# EAGLE board miniadsb (EAGLE 6.1)
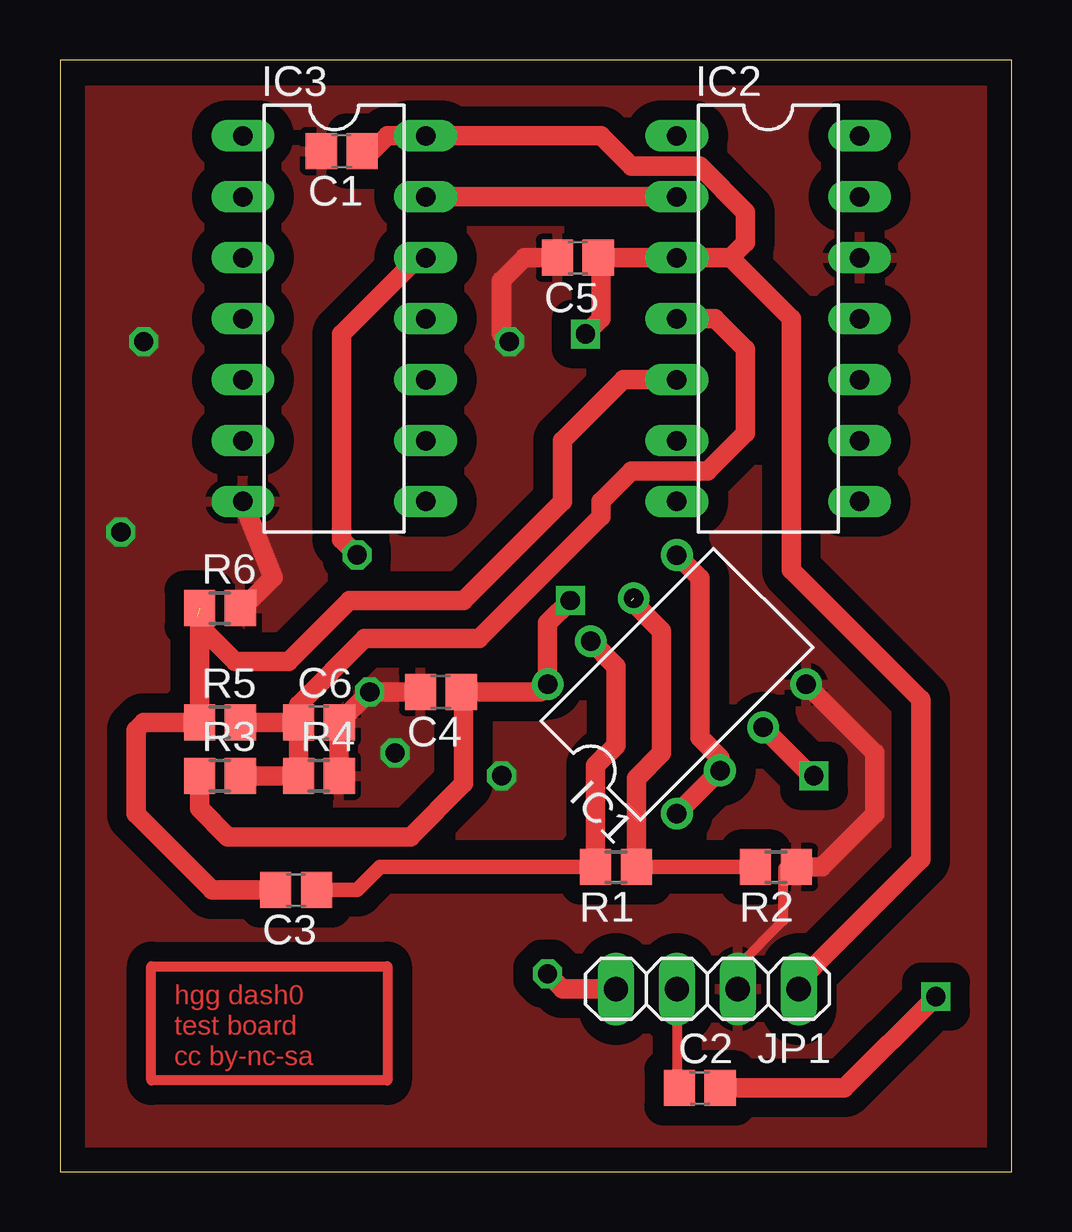
[diagram p0: board, top side]
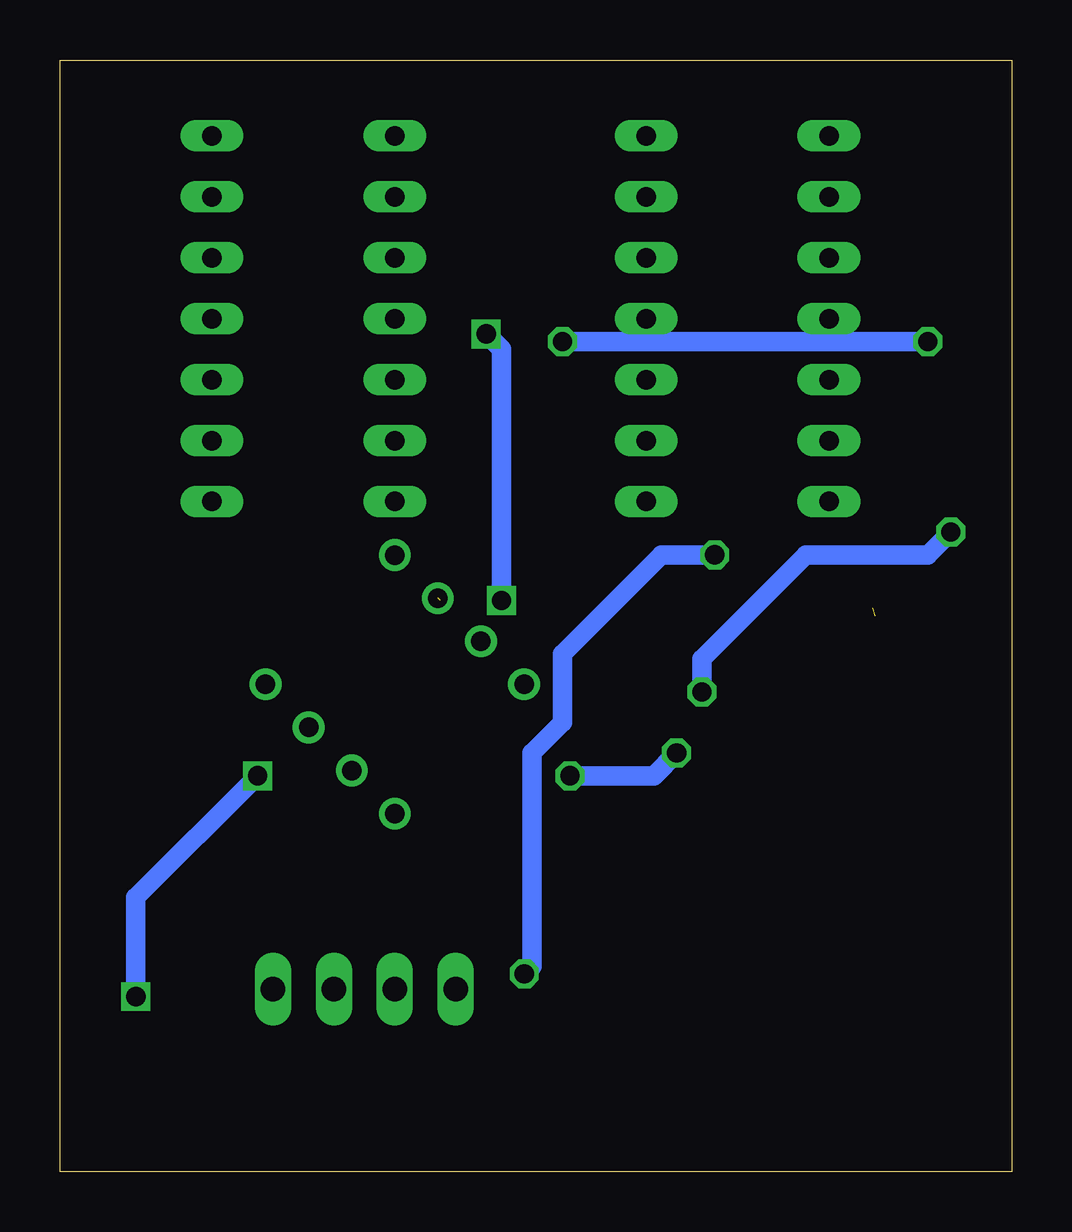
[diagram p1: board, bottom side, seen from below]

Size 39.67 x 46.34 mm. Coordinates in mm from the lower left corner, seen from the top.
Outline: 0,0 39.68,0 39.68,46.34 0,46.34 0,0
Copper layers (1*16): Top 0.035mm / dielectric 1.5mm / Bottom 0.035mm
Design rules: minimum track width 10mil, minimum drill 24mil, track to track 8mil, track to pad 8mil, pad to pad 8mil, via to via 8mil, smd to smd 8mil, copper to edge 40mil, drill to drill 8mil, minimum pad ring 10mil, minimum via ring 8mil, stop-mask expansion 4mil, vias tented up to drill 0mil, thermal gap 10mil

## Footprints (pad centres in the part's own frame; a part is rotated, then mirrored left to right if it is on the bottom)
C0805 = smd 1.3 x 1.5: 1 -0.85,0; 2 0.85,0
DIL08 = drill 0.813 pad 1.27: 1 -3.81,-3.81; 2 -1.27,-3.81; 3 1.27,-3.81; 4 3.81,-3.81; 5 3.81,3.81; 6 1.27,3.81; 7 -1.27,3.81; 8 -3.81,3.81
DIL14 = drill 0.813 long: 1 -7.62,-3.81; 2 -5.08,-3.81; 3 -2.54,-3.81; 4 0,-3.81; 5 2.54,-3.81; 6 5.08,-3.81; 7 7.62,-3.81; 8 7.62,3.81; 9 5.08,3.81; 10 2.54,3.81; 11 0,3.81; 12 -2.54,3.81; 13 -5.08,3.81; 14 -7.62,3.81
1X04 = drill 1.016 long: 1 -3.81,0; 2 -1.27,0; 3 1.27,0; 4 3.81,0
R0805 = smd 1.3 x 1.5: 1 -0.85,0; 2 0.85,0

## Placement (x,y rotation side)
C1  100n  [C0805]  11.75,42.55 180 top
C2  [C0805]  26.67,3.49 0 top
C3  1nF  [C0805]  9.84,11.75 180 top
C4  100n  [C0805]  15.88,20 180 top
C5  100n  [C0805]  21.59,38.1 180 top
C6  470pF  [C0805]  10.79,18.73 0 top
IC1  TLC272P  [DIL08]  25.72,20.32 45 top
IC2  LM339N  [DIL14]  29.53,35.56 270 top
IC3  7414N  [DIL14]  11.43,35.56 270 top
JP1  [1X04]  26.99,7.62 180 top
R1  2k2  [R0805]  23.18,12.7 180 top
R2  1k  [R0805]  29.85,12.7 180 top
R3  1k2  [R0805]  6.67,16.51 0 top
R4  1k2  [R0805]  10.79,16.51 0 top
R5  10k  [R0805]  6.67,18.73 0 top
R6  330k  [R0805]  6.67,23.5 0 top

## Library data of the parts
C1-C6 R1-R6 = resistor
IC1 IC2 = linear
IC3 = 74xx-us
JP1 = pinhead

## Nets
/ADSB_TTL: IC2.2 IC3.13
ADSB: IC3.12 JP1.4
ADSB_IMP: IC1.1 IC1.2 IC1.5
ADSB_IN: C2.1 JP1.3
ADSB_PREAMP: C3.2 IC2.5 R5.1 R6.1
GND: C1.2 C4.2 C5.2 C6.2 IC1.4 IC2.12 IC3.7 JP1.2 R2.1 R4.2 R6.2
N$1: C2.2 IC1.3
N$2: C3.1 IC1.7 R1.2
N$3: IC1.6 R1.1 R2.2
N$5: C6.1 IC2.4 R3.2 R4.1 R5.2
VCC: C1.1 C4.1 C5.1 IC1.8 IC2.3 IC3.14 JP1.1 R3.1

## Tracks (layer width: path | path; a pad name or v marks a point on that pad's centre or on a via)
/ADSB_TTL
  Top 0.813: IC2.2 IC3.13
ADSB  (via drill 0.8)
  Top 0.813: JP1.4 20.95,7.62 v20.32,8.26 | IC3.12 14.92,38.1 11.75,34.92 11.75,26.35 v12.38,25.72
  Bottom 0.813: v12.38,25.72 14.61,25.72 18.73,21.59 18.73,18.73 20,17.46 20,8.57 v20.32,8.26
ADSB_IMP
  Top 0.813: IC1.1 IC1.2 27.51,17.25 26.67,18.1 26.67,24.76 IC1.5
ADSB_IN
  Top 0.406: JP1.3 25.72,3.6 C2.1
ADSB_PREAMP  (1 unrouted)
  Top 0.813: IC2.5 23.5,33.02 20.95,30.48 20.95,27.94 16.83,23.81 12.06,23.81 9.53,21.27 7.3,21.27 6.03,22.54 6.03,22.86 5.72,23.18 | R6.1 R5.1 3.49,18.73 3.17,18.41 3.17,14.92 6.35,11.75 C3.2
GND  (via drill 0.8)
  Top 0.406: JP1.2 28.26,8.57 30.16,10.48 30.16,12.7
  Top 0.813: R6.2 7.62,23.5 8.89,24.77 IC3.7 | C4.2 v12.91,20 C6.2 R4.2 | IC1.4 33.97,17.46 33.97,14.92 31.75,12.7 30.48,12.7 | C5.2 19.37,38.1 18.41,37.15 18.41,34.92 v18.73,34.61
  Bottom 0.813: v12.91,20 12.91,21.38 8.57,25.72 3.49,25.72 v2.54,26.67 | v18.41,16.51 14.92,16.51 v13.97,17.46 | v18.73,34.61 v3.49,34.61
  pour Top (isolate 0.813): 0.95,45.09 44.13,45.09 44.13,0.95 0.95,0.95
N$1  (via drill 0.8)
  Top 0.813: C2.2 32.7,3.49 v36.51,7.3 | v31.43,16.51 31.32,16.51 IC1.3
  Bottom 0.813: v36.51,7.3 36.51,11.43 v31.43,16.51
N$2
  Top 0.61: R1.2 13.33,12.7 12.38,11.75 C3.1
  Top 0.813: R1.2 22.33,16.93 23.18,17.78 23.18,21.06 IC1.7
N$3  (1 unrouted)
  Top 0.61: R2.2 R1.1
  Top 0.813: R1.1 24.03,16.41 25.08,17.46 25.08,22.54 23.81,23.81 23.81,24.13
N$4
  Top 0.406: 3.81,8.57 13.65,8.57 13.65,3.81 3.81,3.81 3.81,8.57
N$5
  Top 0.813: R3.2 R4.1 C6.1 | R5.2 C6.1 | C6.1 9.95,19.47 12.7,22.23 17.46,22.23 22.54,27.3 22.54,27.94 23.81,29.21 26.99,29.21 28.57,30.8 28.57,34.29 27.3,35.56 IC2.4
VCC  (via drill 0.8)
  Top 0.813: R3.1 5.82,15.14 6.98,13.97 14.61,13.97 16.83,16.19 16.83,19.9 C4.1 20.01,20 IC1.8 20.33,22.87 v21.27,23.81 | 27.94,38.1 28.57,38.73 28.57,40.01 26.67,41.91 23.81,41.91 22.54,43.18 IC3.14 13.65,43.18 12.7,42.23 12.6,42.33 C1.1 | 27.94,38.1 IC2.3 C5.1 22.54,38 22.54,35.56 v21.91,34.92 | JP1.1 30.8,7.94 35.88,13.02 35.88,19.68 30.48,25.08 30.48,35.56 27.94,38.1
  Bottom 0.813: v21.27,23.81 21.27,34.29 v21.91,34.92

## Text on the board
Top: hgg dash0 | test board | cc by-nc-sa